# Altium PCB 超声波接近电路2-22PcbDoc.PcbDoc
Units mil, origin at the board's own origin, x right, y up, seen from the top; angles counter-clockwise.
Board outline 2495 x 1070 mil, 2 copper layers (Top Layer 1, Bottom Layer 1), stack 26.556 mil thick; 47 components, 104 nets, 229 pads, 81 vias.
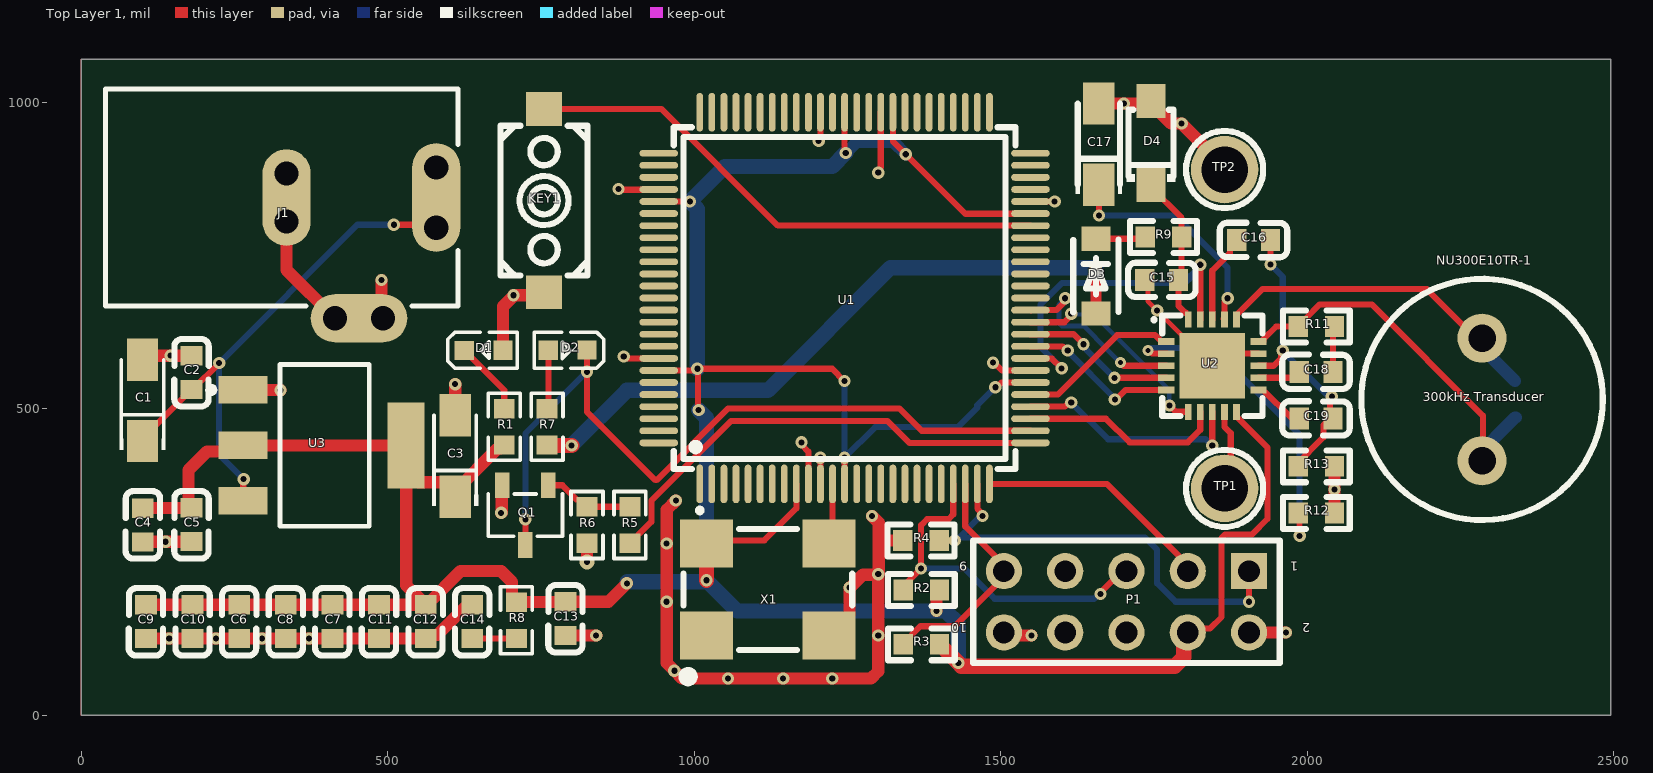
[diagram p0: Top Layer 1 view]
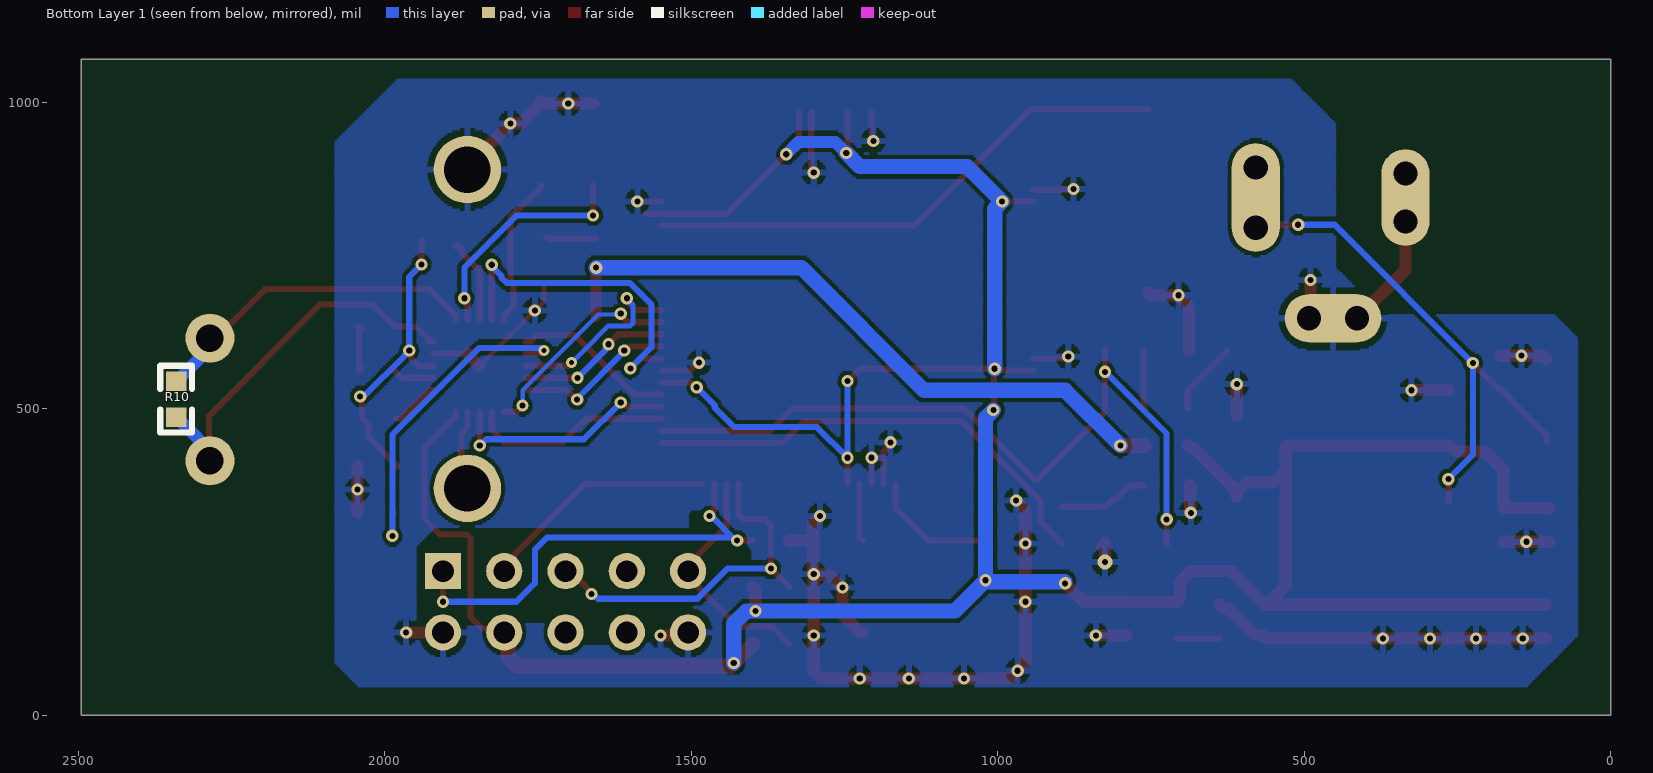
[diagram p1: Bottom Layer 1 view, seen from below]

## Layer stack, top to bottom
Top Solder: solder mask 0.4, Solder Resist, Dk 3.5
Top Layer 1: signal copper 1.378
Dielectric 4: prepreg 2.8, PP-006, Dk 4.1
Dielectric 2: prepreg 2.8, PP-006, Dk 4.1
Dielectric 1: dielectric 12.6, FR-4, Dk 4.8
Dielectric 3: prepreg 2.8, PP-006, Dk 4.1
Dielectric 5: prepreg 2.8, PP-006, Dk 4.1
Bottom Layer 1: signal copper 1.378
Bottom Solder: solder mask 0.4, Solder Resist, Dk 3.5

## Board outline
0,0 0,1070 2495,1070 2495,0

## Design rules (kind name [scope] priority, off if disabled: settings)
Clearance [All] p1: gap=6 ignorepadtopadclearanceinfootprint=FALSE except(0: Arc-Hole Track-Hole SMDPad-Hole THPad-Hole Via-Hole Fill-Hole Poly-Hole Region-Hole Text-Hole)
PolygonConnect [All] p1: connectstyle=Relief reliefconductorwidth=10 reliefentries=4 polygonreliefangle="90 Angle" airgapwidth=10
RoutingVias [All] p1: holewidth=28 width=50 viastyle="Through Hole" minholewidth=28 minwidth=50 maxholewidth=28 maxwidth=50
SolderMaskExpansion [All] p1: expansion=4 istentingtop=FALSE
Width PWR_Width [InNet('VCC3.3')] p1: maxlimit=20 minlimit=20 preferedwidth=20
Width GND_Width [InNet('GND')] p2: maxlimit=20 minlimit=20 preferedwidth=20
Width NORMAL [All] p3: maxlimit=10 minlimit=10 preferedwidth=10
30 further rules are at their usual default settings.

## Components (designator, comment, footprint, x,y, rotation, side; value= is the part's Value field where it differs from the comment)
"300kHz Transducer" "NU300E10TR-1" NU300E10TR-1 2285,415 r0 top
C1 "Cap Pol1" CAP-SMD_L3.2-W1.6-RD 100,457.22 r90 top value=100uF
C2 "Cap" C0603 180,531.32 r90 top value=0.1uF
C3 "Cap Pol1" CAP-SMD_L3.2-W1.6-RD 610,366.5 r90 top value=100uF
C4 "Cap" C0603 100.46,337.7 r270 top value=0.1uF
C5 "Cap" C0603 180,283.2 r90 top value=0.01uF
C6 "Cap" C0603 257.74,125 r90 top value=0.01uF
C7 "Cap" C0603 409.82,125 r90 top value=0.01uF
C8 "Cap" C0603 333.78,125 r90 top value=0.01uF
C9 "Cap" C0603 105.67,125 r90 top value=0.01uF
C10 "Cap" C0603 181.71,125 r90 top value=0.01uF
C11 "Cap" C0603 485.85,125 r90 top value=0.01uF
C12 "Cap" C0603 561.89,125 r90 top value=0.01uF
C13 "Cap" C0603 790,130 r90 top value=0.1uF
C14 "100nF" C0603 637.93,125 r90 top
C15 "100nF" C0603 1790,710 r180 top
C16 "3.3nF" C0603 1884.89,775 r0 top
C17 "2.2uF" CAP-SMD_L3.2-W1.6-RD 1660,875 r90 top
C18 "330pF" C0603 1986.91,559.95 r0 top
C19 "15nF" C0603 1986.91,483.95 r0 top
D1 "LED0" LED0603-RD_RED 585,480 r0 top
D2 "MHT192UGCT" LED0603-RD_GREEN 865,635.7 r180 top
D3 "1N4001W" SOD-123F_L2.8-W1.8-LS3.7-RD 1460,695 r270 top
D4 "SMF36A_C353286" SOD-123FL_L2.7-W1.8-LS3.8-RD -1945.81,6041.63 r90 top
J1 "PWR2.5" KLD-0202 39.72,844.37 r0 top
KEY1 "K2-3.6×6.1_SMD" KEY-SMD_2P-L6.2-W3.6-LS8.0 755,839.31 r270 top
P1 "Header 5X2" HDR2X5 1905,235 r180 top
Q1 "BC817-40,215" SOT-23-3_L2.9-W1.6-P1.90-LS2.8-BR 50723.47,-27657.24 r90 top
R1 "Res2" R0603 650,615 r270 top value=1K
R2 "Res2" R0603 1225.69,164 r0 top value=1K
R3 "Res2" R0603 1225.69,75.64 r0 top value=1K
R4 "Res2" R0603 1225,245 r0 top value=1K
R5 "470Ω" R0603 935,165.57 r90 top
R6 "20kΩ" R0603 865,165.57 r90 top
R7 "4.7kΩ" R0603 720,615 r270 top
R8 "1k" R0603 749.8,10.09 r90 top
R9 "10Ω" R0603 1620.69,740 r0 top
R10 "10kΩ" R0603 2300,370.69 r90 bottom
R11 "200Ω" R0603 2159.31,674.01 r180 top
R12 "0" R0603 1870,290 r0 top
R13 "0" R0603 1870,366 r0 top
TP1 "5009" TEST-TH_BD3.18-P1.93 1905,330 r0 top
TP2 "5009" TEST-TH_BD3.18-P1.93 1905,850 r0 top
U1 "EPM240T100C5N" TQFP-100_L14.0-W14.0-P0.50-LS16.0-BL 1360,620 r0 top
U2 "TUSS4470TRTJR" QFN-20_L4.0-W4.0-P0.50-TL-EP2.7 -46561.58,-47901.66 r0 top
U3 "REG1117-3" ZZ311 335,400 r270 top
X1 "24MHz" OSC-SMD_4P-L7.0-W5.0-BL_SIT1602 1060,-65 r0 top

## Footprints (in the part's own frame and the unit in brackets; to place one, negate y for a bottom-side part, rotate by r counter-clockwise, add the part's x,y. Pads: shape width x height; smd on the part's side, far side on the other; paste and mask are expansions set on the pad)
C0603 [mm]
  rect 0.8x0.9 smd: 1(0,0) 2(1.4,0)
  silkscreen extent -0.71,-0.71 2.09,0.72
CAP-SMD_L3.2-W1.6-RD [mil]
  rect 69.19x51.02 smd: 1(-10,0) 2(122.78,0)
  silkscreen extent -25,-37 122,37
HDR2X5 [mm] "Connector; Header; 5x2 Position"
  rect 1.5x1.5 hole 0.9: 1(0,0)
  round 1.5 hole 0.9: 2(0,2.54) 3(2.54,0) 4(2.54,2.54) 5(5.08,0) 6(5.08,2.54) 7(7.62,0) 8(7.62,2.54) 9(10.16,0) 10(10.16,2.54)
  silkscreen extent -1.27,-1.27 11.43,3.81
KEY-SMD_2P-L6.2-W3.6-LS8.0 [mm]
  rect 1.4x1.5 smd: 1(-3.8,0) 2(3.8,0)
  silkscreen extent -3.1,-1.8 3.1,1.8
KLD-0202 [mm] "DC Power Jack, 2.5mm, KLD Series, PCB Mount"
  oval 2x4.5 all layers, no hole: 1(13.7,0)
  round 1.5 hole 1: 1A(13.7,-1.25) 1B(13.7,1.25) 2A(7.5,-1) 2B(7.5,1) 3A(9.5,-5) 3B(11.5,-5)
  oval 2x4 all layers, no hole: 2(7.5,0)
  oval 4x2 all layers, no hole: 3(10.5,-5)
  silkscreen extent 0,-4.5 14.6,4.5
LED0603-RD_GREEN [mm]
  rect 0.8x0.8 smd: 1(1.016,1.016) 2(2.615,1.023)
  silkscreen extent 0.33,0.27 3.21,1.78
LED0603-RD_RED [mm]
  rect 0.8x0.8 smd: 1(1.016,2.921) 2(2.615,2.928)
  silkscreen extent 0.33,2.18 3.21,3.68
NU300E10TR-1 [mil]
  round 80 hole 45: 1(0,200) 2(0,0)
  silkscreen extent -197,-97 197,297
OSC-SMD_4P-L7.0-W5.0-BL_SIT1602 [mil]
  rect 86.61x78.74 smd: 1(-40,195) 2(160,195) 3(160,345) 4(-40,345)
  silkscreen extent -78,120 198,368
QFN-20_L4.0-W4.0-P0.50-TL-EP2.7 [mm]
  rect 0.665x0.28 smd: 1(1227.62,1232.18) 2(1227.62,1231.68) 3(1227.62,1231.18) 4(1227.62,1230.68) 5(1227.62,1230.18) 11(1231.435,1230.18) 12(1231.435,1230.68) 13(1231.435,1231.18) 14(1231.435,1231.68) 15(1231.435,1232.18)
  rect 0.28x0.665 smd: 6(1228.527,1229.273) 7(1229.027,1229.273) 8(1229.527,1229.273) 9(1230.027,1229.273) 10(1230.527,1229.273) 16(1230.527,1233.088) 17(1230.027,1233.088) 18(1229.527,1233.088) 19(1229.027,1233.088) 20(1228.527,1233.088)
  rect 2.7x2.7 smd: 21(1229.527,1231.18)
  silkscreen extent 1227.04,1229.1 1231.6,1233.26
R0603 [mil]
  rect 31.75x34.02 smd: 1(115,40) 2(174.31,40)
  silkscreen extent 90,14 199,66
SOD-123F_L2.8-W1.8-LS3.7-RD [mm]
  rect 1x1.2 smd: 1(-2.084,4.953) 2(1.016,4.953)
  silkscreen extent -2.05,4.02 0.96,5.9
SOD-123FL_L2.7-W1.8-LS3.8-RD [mm]
  rect 1.4x1.2 smd: 1(-131.486,-93.747) 2(-128.017,-93.747)
  silkscreen extent -131.36,-94.75 -128.38,-92.74
SOT-23-3_L2.9-W1.6-P1.90-LS2.8-BR [mm]
  rect 1.07x0.6 smd: 1(712.019,1269.025) 2(712.019,1270.925) 3(709.549,1269.975)
  silkscreen extent 709.91,1268.44 711.66,1271.51
TEST-TH_BD3.18-P1.93 [mm]
  round 2.8 hole 1.93: 1(-1.016,1.016)
  silkscreen extent -2.62,-0.58 0.58,2.61
TQFP-100_L14.0-W14.0-P0.50-LS16.0-BL [mm]
  oval 0.28x1.6 smd: 1(-8.915,-6.166) 2(-8.415,-6.166) 3(-7.915,-6.166) 4(-7.415,-6.166) 5(-6.915,-6.166) 6(-6.415,-6.166) 7(-5.915,-6.166) 8(-5.415,-6.166) 9(-4.915,-6.166) 10(-4.415,-6.166) 11(-3.915,-6.166) 12(-3.415,-6.166) 13(-2.915,-6.166) 14(-2.415,-6.166) 15(-1.915,-6.166) 16(-1.415,-6.166) 17(-0.915,-6.166) 18(-0.415,-6.166) 19(0.085,-6.166) 20(0.585,-6.166) 21(1.085,-6.166) 22(1.585,-6.166) 23(2.085,-6.166) 24(2.585,-6.166) 25(3.085,-6.166) 51(3.085,9.234) 52(2.585,9.234) 53(2.085,9.234) 54(1.585,9.234) 55(1.085,9.234) 56(0.585,9.234) 57(0.085,9.234) 58(-0.415,9.234) 59(-0.915,9.234) 60(-1.415,9.234) 61(-1.915,9.234) 62(-2.415,9.234) 63(-2.915,9.234) 64(-3.415,9.234) 65(-3.915,9.234) 66(-4.415,9.234) 67(-4.915,9.234) 68(-5.415,9.234) 69(-5.915,9.234) 70(-6.415,9.234) 71(-6.915,9.234) 72(-7.415,9.234) 73(-7.915,9.234) 74(-8.415,9.234) 75(-8.915,9.234)
  oval 1.6x0.28 smd: 26(4.785,-4.466) 27(4.785,-3.966) 28(4.785,-3.466) 29(4.785,-2.966) 30(4.785,-2.466) 31(4.785,-1.966) 32(4.785,-1.466) 33(4.785,-0.966) 34(4.785,-0.466) 35(4.785,0.034) 36(4.785,0.534) 37(4.785,1.034) 38(4.785,1.534) 39(4.785,2.034) 40(4.785,2.534) 41(4.785,3.034) 42(4.785,3.534) 43(4.785,4.034) 44(4.785,4.534) 45(4.785,5.034) 46(4.785,5.534) 47(4.785,6.034) 48(4.785,6.534) 49(4.785,7.034) 50(4.785,7.534) 76(-10.615,7.534) 77(-10.615,7.034) 78(-10.615,6.534) 79(-10.615,6.034) 80(-10.615,5.534) 81(-10.615,5.034) 82(-10.615,4.534) 83(-10.615,4.034) 84(-10.615,3.534) 85(-10.615,3.034) 86(-10.615,2.534) 87(-10.615,2.034) 88(-10.615,1.534) 89(-10.615,1.034) 90(-10.615,0.534) 91(-10.615,0.034) 92(-10.615,-0.466) 93(-10.615,-0.966) 94(-10.615,-1.466) 95(-10.615,-1.966) 96(-10.615,-2.466) 97(-10.615,-2.966) 98(-10.615,-3.466) 99(-10.615,-3.966) 100(-10.615,-4.466)
  silkscreen extent -9.99,-7.37 4.16,8.61
ZZ311 [mil]
  rect 45x80 smd: 1(-130.55,-70.74) 2(-40,-70.74) 3(50.55,-70.74)
  rect 140x60 smd: 4(-40,195)
  silkscreen extent -172,-128 92,135

## Part data
C1 C3: "Polarized Capacitor (Radial)", LatestRevisionDate=17-Jul-2002, LatestRevisionNote="Re-released for DXP Platform.", PackageReference=RB7.6-15, Published=8-Jun-2000, Publisher="Altium Limited"
C2 C4 C5 C6 C7 C8 C9 C10 C11 C12 C13: "Capacitor", LatestRevisionDate=17-Jul-2002, LatestRevisionNote="Re-released for DXP Platform.", PackageReference=RAD-0.3, Published=8-Jun-2000, Publisher="Altium Limited"
C15: BOM_JLCPCB Part Class="Basic Part", BOM_Manufacturer=YAGEO, BOM_Manufacturer Part=CC0603KRX7R9BB104, BOM_Supplier=LCSC, BOM_Supplier Part=C14663, nameAlias=Capacitance, spicePre=C, spiceSymbolName=CC0603KRX7R9BB104
C16: BOM_JLCPCB Part Class="Extended Part", BOM_Manufacturer=MuRata, BOM_Manufacturer Part=GRM1885C1H332JA01D, BOM_Supplier=LCSC, BOM_Supplier Part=C77036, nameAlias=Capacitance, spicePre=C, spiceSymbolName=GRM1885C1H332JA01D
C17: library part 2.2uF_1, BOM_JLCPCB Part Class="Extended Part", BOM_Manufacturer=KEMET, BOM_Manufacturer Part=T491A225K035AT, BOM_Supplier=LCSC, BOM_Supplier Part=C122264, Contributor=LCSC, nameAlias=Capacitance, spicePre=C, spiceSymbolName=T491A225K035AT
C18: BOM_JLCPCB Part Class="Basic Part", BOM_Manufacturer=SAMSUNG, BOM_Manufacturer Part=CL10C331JB8NNNC, BOM_Supplier=LCSC, BOM_Supplier Part=C1664, nameAlias=Capacitance, spicePre=C, spiceSymbolName=CL10C331JB8NNNC
C19: BOM_JLCPCB Part Class="Extended Part", BOM_Manufacturer=YAGEO, BOM_Manufacturer Part=CC0603JRX7R9BB153, BOM_Supplier=LCSC, BOM_Supplier Part=C519550, Contributor=LCSC, nameAlias=Capacitance, spicePre=C, spiceSymbolName=CC0603JRX7R9BB153
D1: "Typical INFRARED GaAs LED", LatestRevisionDate=08-Jul-2005, LatestRevisionNote="Mech Layer 1 removed.", PackageReference=LED-0, Published=8-Jun-2000, Publisher="Altium Limited"
D2: BOM_JLCPCB Part Class="Extended Part", BOM_Manufacturer=MEIHUA, BOM_Manufacturer Part=MHT192UGCT, BOM_Supplier=LCSC, BOM_Supplier Part=C389519, Contributor=LCSC, spicePre=L, spiceSymbolName=MHT192UGCT
D3: BOM_JLCPCB Part Class="Extended Part", BOM_Manufacturer=Jingdao, BOM_Manufacturer Part=1N4001W, BOM_Supplier=LCSC, BOM_Supplier Part=C162732, Contributor=LCSC, spicePre=D, spiceSymbolName=1N4001W
D4: BOM_JLCPCB Part Class="Extended Part", BOM_Manufacturer="Shandong Jingdao Microelectronics", BOM_Manufacturer Part=SMF36A, BOM_Supplier=LCSC, BOM_Supplier Part=C353286, Contributor=LCSC, spicePre=D, spiceSymbolName=SMF36A_C353286
J1: "Low Voltage Power Supply Connector", ComponentLink1Description="Manufacturer Link", ComponentLink1URL=http://domino.kycon.com/internet/Products.html, DatasheetDocument=09-May-2002, Published=17-Dec-2003, Publisher="Altium Limited"
KEY1: BOM_Manufacturer Part=K2-1107ST-A4SW-06, BOM_Supplier=LCSC, BOM_Supplier Part=C118141, Contributor=LCEDA_Lib, spicePre=K, spiceSymbolName=K2-3.6×6.1_SMD, 制造商=韩国韩荣
P1: "Header, 5-Pin, Dual row", LatestRevisionDate=17-Jul-2002, LatestRevisionNote="Re-released for DXP Platform.", Publisher="Altium Limited"
Q1: BOM_JLCPCB Part Class="Extended Part", BOM_Manufacturer=Nexperia, BOM_Manufacturer Part=BC817-40,215, BOM_Supplier=LCSC, BOM_Supplier Part=C52801, spicePre=Q, spiceSymbolName=BC817-40,215
R1 R2 R3 R4: "Resistor", LatestRevisionDate=17-Jul-2002, LatestRevisionNote="Re-released for DXP Platform.", PackageReference=AXIAL-0.4, Published=8-Jun-2000, Publisher="Altium Limited"
R5: BOM_JLCPCB Part Class="Extended Part", BOM_Manufacturer=UniOhm, BOM_Manufacturer Part=0603WAJ0471T5E, Resistance (Ohms)=470, BOM_Supplier=LCSC, BOM_Supplier Part=C25241, nameAlias=Resistance, spicePre=R, spiceSymbolName=0603WAJ0471T5E
R6: BOM_JLCPCB Part Class="Basic Part", BOM_Manufacturer=UniOhm, BOM_Manufacturer Part=0603WAF2002T5E, Resistance (Ohms)=20K, BOM_Supplier=LCSC, BOM_Supplier Part=C4184, nameAlias=Resistance, spicePre=R, spiceSymbolName=0603WAF2002T5E
R7: BOM_JLCPCB Part Class="Basic Part", BOM_Manufacturer=UniOhm, BOM_Manufacturer Part=0603WAF4701T5E, Resistance (Ohms)=4.7K, BOM_Supplier=LCSC, BOM_Supplier Part=C23162, nameAlias=Resistance, spicePre=R, spiceSymbolName=0603WAF4701T5E
R9: BOM_JLCPCB Part Class="Extended Part", BOM_Manufacturer=PANASONIC, BOM_Manufacturer Part=ERJPA3J100V, Resistance (Ohms)=10, BOM_Supplier=LCSC, BOM_Supplier Part=C441879, Contributor=LCSC, nameAlias=Resistance, spicePre=R, spiceSymbolName=ERJPA3J100V
R10: BOM_JLCPCB Part Class="Basic Part", BOM_Manufacturer=UniOhm, BOM_Manufacturer Part=0603WAF1002T5E, Resistance (Ohms)=10K, BOM_Supplier=LCSC, BOM_Supplier Part=C25804, nameAlias=Resistance, spicePre=R, spiceSymbolName=0603WAF1002T5E
R11: BOM_JLCPCB Part Class="Extended Part", BOM_Manufacturer=PANASONIC, BOM_Manufacturer Part=ERJ-PA3F2000V, Resistance (Ohms)=200, BOM_Supplier=LCSC, BOM_Supplier Part=C254528, Contributor=LCSC, nameAlias=Resistance, spicePre=R, spiceSymbolName=ERJ-PA3F2000V
R12 R13: library part 0_1, BOM_JLCPCB Part Class="Extended Part", BOM_Manufacturer=YAGEO, BOM_Manufacturer Part=RC0603JR-070RL, Resistance=0Ω, BOM_Supplier=LCSC, BOM_Supplier Part=C95177, nameAlias="Resistance (Ohms)", spicePre=R, spiceSymbolName=RC0603JR-070RL
TP1 TP2: BOM_JLCPCB Part Class="Extended Part", BOM_Manufacturer=Keystone, BOM_Manufacturer Part=5009, BOM_Supplier=LCSC, BOM_Supplier Part=C238126, Contributor=LCSC, spicePre=U, spiceSymbolName=5009
U1: "MAX II 3.3/2.5V CPLD, 80 IOs, 240 Logic Elements, 100-Pin Plastic TQFP, Commercial Temperature, Speed Grade 5, Pb-Free", Supplier Part Number 1=544-1964-ND, Code_JEDEC=MS-026-AED, ComponentLink1Description="Manufacturer Link", ComponentLink1URL=http://www.altera.com/products/devices/cpld/max2/mx2-index.jsp, ComponentLink2Description=Handbook, ComponentLink2URL=http://www.altera.com/literature/hb/max2/max2_mii5v1.pdf, ComponentLink3Description="Packaging Specification", ComponentLink3URL=http://www.altera.com/literature/ds/dspkg.pdf, DatasheetVersion="ver1.8, Jul-2006", LatestRevisionDate=13-Apr-2006, LatestRevisionNote="IPC-7351 Footprint Added.", Note="Each set of VCCIO pins can be connected to 3.3V, 2.5V, 1.8V, or 1.5V.", PackageDescription="100-Pin Plastic Thin Quad Flat Pack (TQFP100) - Wire Bond", PackageReference=TQFP100, PackageVersion="ver15.1, May-2008", Published=4-Mar-2005, Publisher="Altium Limited", Supplier 1=Digi-Key, Supplier 2=Farnell, Supplier 3=Farnell, Supplier Part Number 2=1662268, Supplier Part Number 3=1453503
U2: library part CMP-0081414-4, "Ultrasonic Sensor Signal Conditioner IC for Directly", Alternate Manufacturer="Texas Instruments", Alternate PartNumber=PGA44801RTJT, AEC Category=Q200, AEC Qualified=N, ComponentLink1Description="Datasheet Link", ComponentLink1URL=http://www.ti.com/lit/ds/symlink/pga448.pdf, ComponentLink2Description="Product Folder", ComponentLink2URL=http://www.ti.com/product/pga448, ComponentLink3Description="Online Datasheet", ComponentLink3URL=http://www.ti.com/product/pga448/datasheet, CompType=IC, Manufacturer="Texas Instruments", MountType=SMT, PackageDescription=WQFN-20, PackageReference=RTJ0020J, PartNumber=TUSS4470TRTJR, SizeArea_mm2=16, SizeAreaWB_mm2=25, SizeX_mm=4, SizeY_mm=4, SizeZ_mm=0.8
U3: "800mA Low Dropout Positive Regulator Fixed 2.85V,3V,3.3V and 5V", ComponentLink1Description="Manufacturer Link", ComponentLink1URL=http://www.ti.com/, ComponentLink2Description=Datasheet, ComponentLink2URL=http://www-s.ti.com/sc/ds/reg1117.pdf, DatasheetVersion=1994, LatestRevisionDate=17-Jul-2002, LatestRevisionNote="Re-released for DXP Platform.", PackageDescription="SOT-223/SC-73; 4 Leads; Body 6.7 x 7.3 mm, inc. leads (LxW max)", PackageReference=ZZ311, PackageVersion=revC, Published=8-Jun-2000, Publisher="Altium Limited"
X1: library part oscillator
C14: Contributor=LCEDA_Lib, nameAlias=Value(F), spicePre=C, spiceSymbolName=C_0603_US
R8: Contributor=LCEDA_Lib, nameAlias=Value(Ω), spicePre=R, spiceSymbolName=R_0603_EU

## Via types
v1: diameter 20, hole 10, Top Layer 1 to Bottom Layer 1, tented both sides, 78 vias
v2: diameter 18, hole 8, Top Layer 1 to Bottom Layer 1, tented both sides, 2 vias
v3: diameter 24, hole 10, Top Layer 1 to Bottom Layer 1, 1 vias

## Nets (pads, with @x,y where several pads share a name; then routed paths per layer and width w, separated by ;. In a path a pad name is that pad's centre, name@x,y a point inside that pad or via, vN(x,y) a via of type N, cw(c..) or ccw(c..) an arc to the next point about the centre after c; other vN are vias at no path point)
DGND: R12.1 U2.2 | length 535.6
  Top Layer 1 w10: v2(1740,595) 1742.16,595 1746.97,590.2 1769.39,590.2 U2.2 ; R12.1 1987.5,327.5 v1(1987.5,292.5)
  Bottom Layer 1 w10: v2@1746.21,599.04 1845.96,599.04 1987.5,457.5 v1(1987.5,292.5)
GND: C1.2 C2.2 C3.2 C4.2 C5.1 C6.1 C7.1 C8.1 C9.1 C10.1 C11.1 C12.1 C13.1 C14.2 C15.2 C17.2 D1.2 D4.2 J1.2 J1.2A J1.2B J1.3 J1.3A J1.3B KEY1.2 P1.2 P1.10 Q1.2 R4.1 R6.1 R12.2 R13.2 TP2.1 U1.10 U1.11 U1.32 U1.46 U1.60 U1.65 U1.79 U1.93 U2.14 U2.21 U3.1 X1.2 | length 3642.4
  Top Layer 1 w8: C15.2@1739.89,705 1739.89,675.11 v1(1755,660) 1796.85,618.15 U2.21
  Top Layer 1 w10: v1@876.48,856.97 U1.79@942.08,856.97 ; v1@885,581.97 U1.93 ; v1(1175,445) 1175,441.21 1186.17,430.04 U1.10 ; v1(1202.93,936.72) 1202.93,940.5 1205.66,943.24 1205.66,983.35 U1.65 ; U1.11@1205.63,377.48 v1(1205.63,420) ; v1(1300,885) 1300,888.79 1304.28,893.07 U1.60 ; R4.1@1338.87,285 R4.1@1340,283.87 ; v1(1487.16,575) 1489.33,575 1501.88,562.45 1547.35,562.45 U1.32@1547.38,562.49 ; U1.46 v1(1587.88,837.88) ; U2.21@1864.69,589.68 U2.14
  Top Layer 1 w20: C4.2 100.76,282.9 v1(137.73,282.9) 174.7,282.9 C5.1@175,283.2 ; C1.2@105,580 111.43,586.43 v1(145.71,586.43) C2.2 ; C9.1 v1(143.69,125) C10.1 v1(219.73,125) C6.1 v1(371.8,125) C11.1 C12.1 567.64,130.75 580.75,130.75 624.36,174.36 632.18,174.36 C14.2 ; U3.1 324.45,530.55 v1(325,530) ; J1.2A 335,726.26 J1.3A ; J1.3 462.87,647.52 490,674.65 v1(490,710) ; C3.2 v1(610,540) ; v1(685,330) 685.77,330.77 685.77,373.7 Q1.2 ; D1.2 687.95,666.87 705,683.92 v1(705,685) 750.3,685 KEY1.2 ; C13.1 v1(840,130) ; v3(825,250) R6.1 R6.1@830,275.57 ; v1(970,350) 955,335 v1(955,280) v1(955,185) 955,85 v1(967.5,72.5) 980,60 v1(1055,60) v1(1145,60) v1(1225,60) 1288.28,60 1300,71.72 v1(1300,130) v1(1300,230) ; X1.2@1220,135 1223.94,135 1253.31,164.37 v1(1253.31,208.31) 1254.39,208.31 1275.32,229.23 1299.23,229.23 v1(1300,230) ; v1(1290,325) 1300.77,314.23 1300.77,285 ; R4.1@1338.87,285 1300.77,285 ; R4.1@1340,283.87 R4.1 ; P1.10 1510,130 v1(1550,130) ; P1.10@1505,145 P1.10@1507.53,142.47 ; C17.2 v1(1700.58,997.78) D4.2@1741.17,997.78 ; D4.2 1745,997.67 1777.67,965 v1(1795,965) 1865,895 TP2.1 ; U2.21 U2.21@1864.69,589.68 ; P1.2 v1(1965,135) ; R12.2 v1(2044.31,368) R13.2 ; v1(1300,230) 1300.77,230.77 1300.77,285
  other v1: 295,125 885,585 876.48,858.21
NetC1_1: C1.1 C2.1 J1.1 J1.1A J1.1B U3.3 | length 894.9
  Top Layer 1 w10: C1.1@105,447.22 105,456.31 167.28,518.59 167.28,520.57 178.03,531.32 C2.1 181.97,531.32 v1(225,574.35) v1@225,575 ; U3.3 264.26,384.26 v1(265,385) ; v1(510,800) 547.34,800 579.09,831.75 J1.1
  Bottom Layer 1 w10: v1(265,385) 225,425 v1(225,574.35) 450.65,800 v1(510,800)
NetC14_1: C14.1 R8.1 | length 71.9
  Top Layer 1 w10: C14.1 638.02,125.09 R8.1
NetC15_1: C15.1 D4.1 R9.2 U2.20 | length 249.8
  Top Layer 1 w10: D4.1 1745,861.06 1795,811.06 R9.2 1795,710 1790,705 1790,667.28 1800.86,656.43 1801.88,656.43 1805.63,652.68 U2.20
NetC16_1: C16.1 U2.18 | length 141.1
  Top Layer 1 w10: U2.18 1845,725.11 1874.14,754.25 1874.14,762.28 1876.86,765 C16.1@1884.89,765
NetC17_1: C17.1 U2.17 | length 384.4
  Top Layer 1 w10: v1(1660,815) C17.1 ; U2.17@1863.18,646.61 U2.17 1864.69,674.68 v1(1870,680)
  Bottom Layer 1 w10: v1(1660,815) 1785,815 1870,730 v1(1870,680)
NetC18_1: C18.1 U2.12 | length 66.5
  Top Layer 1 w10: U2.12@1920.61,549.8 U2.12 1972.27,550.32 C18.1@1981.91,559.95
NetC18_2: C18.2 R11.1 | length 85.3
  Top Layer 1 w10: C18.2@2037.02,564.95 C18.2 2042.02,631.71 R11.1 ; R11.1@2037.02,631.71 R11.1@2039.31,634.01
NetC19_1: C19.1 U2.11 | length 81.1
  Top Layer 1 w10: U2.11 1927.68,530.63 1974.36,483.95 C19.1@1981.91,483.95
NetD1_1: D1.1 R1.1 | length 121.9
  Top Layer 1 w10: D1.1 690,530 R1.1
NetD2_2: D2.2 R7.1 | length 96.3
  Top Layer 1 w10: R7.1 762.05,502.05 D2.2
NetD3_1: D3.1 R9.1 | length 81.9
  Top Layer 1 w10: D3.1 1732.74,777.05 R9.1
NetQ1_1: Q1.1 R5.2 R6.2 | length 142.7
  Top Layer 1 w10: Q1.1 785,375 809.25,350.75 814.12,350.75 R6.2 ; R6.2@830,339.88 R5.2
P1: U1.1
P2: U1.2
P3: U1.3
P4: U1.4
P5: U1.5
P6: U1.6
P7: U1.7
P8: U1.8
P12: U1.12 X1.3 | length 94.5
  Top Layer 1 w10: X1.3@1220,285 1225.54,290.54 U1.12
P14: U1.14
P15: U1.15
P16: U1.16
P17: U1.17
P18: U1.18
P19: U1.19
P20: U1.20
P21: U1.21
P26: R5.1 U1.26 | length 771.7
  Top Layer 1 w10: R5.1 896.13,280.57 907.01,291.44 907.01,292.58 930,315.57 930,350 1060,480 1315,480 1350.82,444.18 U1.26
P27: D2.1 Q1.3 U1.27 | length 1258.1
  Top Layer 1 w10: Q1.3 v1(724.47,319.47) v1@725,320 ; D2.1 v1(825,560) 825,495 936.53,383.47 938.47,383.47 1055,500 1335,500 1371.14,463.87 U1.27
  Bottom Layer 1 w10: v1(724.47,319.47) 724.47,459.47 v1(825,560)
P28: U1.28 U2.7 | length 330.9
  Top Layer 1 w10: U1.28 1671.57,483.55 1710.12,445 1805,445 1825.31,465.32 U2.7
P29: U1.29 U2.8 | length 383.3
  Top Layer 1 w10: U1.29 1604.45,503.23 1611.21,510 v1(1615,510) ; v1(1845,440) U2.8
  Bottom Layer 1 w10: v1(1615,510) 1675,450 1834.14,450 1844.14,440 v1(1845,440)
P30: U1.30 U2.1 | length 266.1
  Top Layer 1 w10: U1.30 1592.92,522.92 1690,620 1751.69,620 1761.81,609.88 1769.39,609.88 U2.1
P33: U1.33 U2.19 | length 556
  Top Layer 1 w10: U1.33@1548.33,581.78 1583.22,581.78 v1(1599.23,565.77) ; U2.19 v1(1825.26,734.74)
  Bottom Layer 1 w10: v1(1599.23,565.77) 1565,600 1565,670 1600,705 1801.08,705 1809.58,713.5 1809.58,716.91 1825.26,732.58 v1(1825.26,734.74)
P34: U1.34 U2.5 | length 265.7
  Top Layer 1 w10: U1.34 1600.9,601.66 1607.56,595 v1(1609.19,595) ; v1(1686.08,515) 1688.25,515 1703.88,530.63 U2.5
  Bottom Layer 1 w10: v1(1609.19,595) 1609.19,593.45 1686.08,516.55 v1(1686.08,515)
P35: U1.35 U2.4 | length 254.5
  Top Layer 1 w10: U1.35@1547.66,621.82 1548.13,621.34 U1.35 1618.66,621.34 v1(1635,605) ; v1(1685.29,550.29) U2.4
  Bottom Layer 1 w10: v1(1635,605) 1635,602.29 1640,597.29 1640,595.57 v1(1685.29,550.29)
P36: U1.36 U2.6 | length 339.1
  Top Layer 1 w10: U1.36 1603.87,641.03 1612.84,650 v1@1615,650 ; v1(1775,505) 1785.12,494.9 U2.6
  Bottom Layer 1 w7: v1@1617.16,653.47 1651.53,653.47 1775,530 v1(1775,505)
  other v1: 1615,655
P37: U1.37 U2.3 | length 316.8
  Top Layer 1 w10: U1.37@1549.09,660 U1.37 1590.71,660.71 1603.47,673.47 1603.47,678.47 v1(1605,680) ; v2(1695,575) 1700,570 U2.3
  Bottom Layer 1 w8: v1@1605,679.14 1595,669.14 1595,639.69 1599.69,635 1635,635 1674.45,595.55 v2(1695,575)
  Bottom Layer 1 w10: v1@1605,679.14 v1(1605,680)
P38: U1.38
P39: U1.39
P40: U1.40
P41: U1.41
P42: U1.42
P43: U1.43
P44: KEY1.1 U1.44 | length 872.2
  Top Layer 1 w10: KEY1.1 946.09,988.91 1136.49,798.51 U1.44
P47: U1.47
P48: U1.48
P49: U1.49
P50: U1.50
P51: U1.51
P52: U1.52
P53: U1.53
P54: U1.54
P55: U1.55
P56: U1.56
P57: U1.57
P58: U1.58
P61: U1.61
P62: U1.62
P64: U1.64
P66: U1.66
P67: U1.67
P68: U1.68
P69: U1.69
P70: U1.70
P71: U1.71
P72: U1.72
P73: U1.73
P74: U1.74
P75: U1.75
P76: U1.76
P77: U1.77
P78: U1.78
P81: U1.81
P82: U1.82
P83: U1.83
P84: U1.84
P85: U1.85
P86: U1.86
P87: U1.87
P88: U1.88
P89: U1.89
P90: U1.90
P91: U1.91
P92: U1.92
P95: U1.95
P96: U1.96
P97: U1.97
P98: U1.98
P99: U1.99
P100: U1.100
SGND: C16.2 C19.2 R13.1 U2.13 | length 494.9
  Top Layer 1 w10: U2.13 1945,570 1957.32,582.32 1957.32,592.32 v1(1960,595) ; v1(1940,735) C16.2 ; R13.1@1980,406 1980,407.13 2026.27,453.4 2026.27,473.2 2037.02,483.95 2037.02,517.02 v1(2040,520)
  Bottom Layer 1 w10: v1(1940,735) 1960,715 v1(1960,595) 1965.6,589.4 1965.6,588.33 1967.59,586.33 ; 1967.61,586.31 2033.93,520 v1(2040,520)
TCK: P1.1 R4.2 U1.24 | length 758.5
  Top Layer 1 w10: R4.2 v1(1425,285) ; U1.24 1461.96,377.05 1461.96,336.83 1470,328.79 v1(1470,325) ; v1(1905,185) P1.1@1905,245
  Bottom Layer 1 w10: v1(1425,285) v1@1426.53,286.53 ; v1(1470,325) 1467.5,325 1429.03,286.53 v1@1426.53,286.53 ; v1(1905,185) 1785,185 1755,215 1755,270 1735,290 1432.16,290 1428.7,286.53 v1@1426.53,286.53
TDI: P1.9 R3.1 U1.23 | length 388.6
  Top Layer 1 w10: R3.1 1340.69,116.77 1368.92,145 1425,145 1505,225 1505,245 1442.08,307.92 U1.23
TDO: P1.3 U1.25 | length 378.3
  Top Layer 1 w10: U1.25 1672.75,377.25 P1.3@1805,245
TMS: P1.5 R2.1 U1.22 | length 603.8
  Top Layer 1 w10: R2.1@1340.69,209 1340.69,210.13 v1(1370,239.44) 1370,310 1380,320 1415,320 1422.39,327.39 U1.22 ; v1(1662.5,197.5) 1662.5,200 1700,237.5 1700,240 P1.5@1705,245
  Bottom Layer 1 w10: v1(1370,239.44) 1440.56,239.44 1490,190 1652.29,190 1659.79,197.5 v1(1662.5,197.5)
VCC: D3.2 R7.2 | length 1095.4
  Top Layer 1 w10: R7.2 R7.2@760.69,440
  Top Layer 1 w18: D3.2@1655,650 v1(1655,730)
  Top Layer 1 w25: R7.2@760.69,440 v1(800,440)
  Bottom Layer 1 w25: v1(800,440) 890,530 1120,530 1320,730 v1(1655,730)
VCC3.3: C3.1 C4.1 C5.2 C6.2 C7.2 C8.2 C9.2 C10.2 C11.2 C12.2 C13.2 P1.4 R1.2 R2.2 R3.2 R8.2 U1.9 U1.13 U1.31 U1.45 U1.59 U1.63 U1.80 U1.94 U2.10 U3.2 U3.4 X1.4 | length 6071.5
  Top Layer 1 w10: U1.94 942.27,562.49 1002.49,562.49 v1(1005,565) 1225,565 v1(1245,545) ; U1.80 v1(992.84,837.88) ; v1@1005.2,564.8 1006.05,563.95 1006.05,498.95 v1(1007.11,497.89) ; X1.4@1020,285 1114.24,285 1166.49,337.24 U1.9 ; U1.13@1245,377.48 v1(1245,420) ; v1@1245.23,916.93 U1.63 ; U1.59 1323.97,936.03 v1(1345,915) 1442.14,817.86 U1.45@1548.71,817.86 ; v1(1491.08,535) 1493.25,535 1500.85,542.6 U1.31 U1.31@1548.62,542.6 ; U1.45 U1.45@1548.71,817.86 ; U1.45@1574.69,817.86 U1.45@1548.71,817.86 ; P1.4 1811.49,141.49 1841.49,141.49 1860,160 1860,289.14 1865.86,295 1910,295 1935,320 1935,436.69 1884.37,487.32 U2.10
  Top Layer 1 w20: C4.1 100.76,338.01 174.7,338.01 175,338.31 175,400 205,430 254.26,430 U3.2 U3.4 U3.4@530,400 ; C9.2 C8.2 C12.2@559.92,180.11 ; C3.1 C3.1@610,364.49 ; R1.2 684.12,434.81 679.23,434.81 610,365.59 C3.1@610,364.49 ; v1(890,215) 860.11,185.11 C13.2 789.65,184.76 710.16,184.76 R8.2 708.67,184.4 702.8,190.28 702.8,217.2 685,235 618.75,235 563.86,180.11 C12.2 C12.2@559.92,180.11 ; v1(1395,170) 1395,204 R2.2@1400,209 ; U3.4@530,400 530,212 554.17,187.83 554.17,185.86 C12.2@559.92,180.11 ; U3.4@530,400 550,380 594.49,380 C3.1@610,364.49
  Top Layer 1 w25: v1(1020,220) X1.4@1020,285 ; R3.2 1400,114.51 1403.38,111.13 1404.51,111.13 v1(1430.64,85) 1435.64,80 1783.84,80 1798.48,94.64 1798.48,128.48 P1.4
  Bottom Layer 1 w10: v1(1245,420) 1295,470 1429.86,470 1461.67,501.8 1461.67,505.58 v1(1491.08,535) ; v1(1245,545) 1245,422.8 v1@1246.21,421.59
  Bottom Layer 1 w20: v1(1247.03,916.93) 1265.11,935 1325,935 v1(1345,915)
  Bottom Layer 1 w25: v1@890.71,217.91 1017.91,217.91 v1(1020,220) ; v1(1005,565) 1005,825.72 v1(992.84,837.88) 1049.96,895 1225.11,895 v1(1247.03,916.93) ; v1(1007.11,497.89) 1020,485 v1(1020,220) ; v1(1430.64,85) 1430.64,149.36 1410,170 1070,170 v1(1020,220)
VOUT: TP1.1 U2.9 | length 123.8
  Top Layer 1 w10: U2.9@1864.84,494.74 U2.9 1864.69,470.32 1875,460 1875,390 TP1.1@1865,380 ; TP1.1@1884.84,380.16 TP1.1@1885,380
X+: "300kHz Transducer.2" R10.1 R11.2 U2.15 | length 634.5
  Top Layer 1 w10: U2.15 1927.68,609.37 1928.19,609.88 1928.19,613.07 1949.12,634.01 R11.2 ; R11.2@1986.13,636.27 1995.88,646.01 1996.2,646.01 2020.19,670 2105,670 2286.25,488.75 2286.25,416.25 2285,415
  Bottom Layer 1 w20: 2285,415 2285,431.24 2306.09,452.32 2306.09,452.91 2338.87,485.69 R10.1
X-: "300kHz Transducer.1" R10.2 U2.16 | length 550.5
  Top Layer 1 w10: U2.16 1884.37,652.68 1926.69,695 2195,695 2280,610
  Bottom Layer 1 w10: 2285,598.87 2285,615 ; 2303.87,624.31 2305,624.31 ; R10.2@2338.87,545 R10.2
  Bottom Layer 1 w20: 2285,598.87 R10.2@2338.87,545
pads on no net: P1.6 P1.7 P1.8 X1.1
copper on no net: | length 7130
  Top Layer 1 w1: 0,0 2495,0 2495,1070 0,1070 0,0

## Polygon pours and split planes (outlines as drawn)
GND on Bottom Layer 1 "NONET_L-01_P-001" (hatched Horizontal grid 4 track 5, remove dead copper, pour order 0): 525,1040 1975,1040 2080,935 2080,85 2040,45 140,45 55,130 55,615 95,655 375,655 450,730 450,965

## Other copper
Bottom Layer 1:
  pour cut-out: 1490,280 1930,280 1945,265 1940,260 1940,200 1770,200 1735,165 1735,115 1580,115 1575,120 1582.5,127.5 1582.5,190 1475,190 1470,195 1470,265 1487.5,282.5
  pour cut-out: 1920,305 1950,275 1950,140 1570,160 1470,195 1465,275 1495,305
  pour cut-out: 1662.5,197.5 1692.5,197.5 1725,200 1725,170 1682.5,162.5 1657.5,187.5 1657.5,192.5
  pour cut-out: 1527.5,182.5 1557.5,182.5 1590,185 1590,155 1547.5,147.5 1522.5,172.5 1522.5,177.5
  pour cut-out: 1415,285 1400,270 1400,245 1430,245 1450,225 1485,225 1490,230 1490,280 1485,285
  pour cut-out: 1470,315 1460,305 1455,305 1465,295 1505,295 1505,330 1500,335 1470,335
  pour cut-out: 1645,615 1665,615 1705,575 1705,555 1700,550 1665,550 1645,570

## Silkscreen, mask and mechanical layers (free items; w line width, h text height)
Drill Drawing:
  text ".legend" at 2810,594.99 h60

## Text inside footprints (layer, text, board x,y; h text height)
P1: Top Overlay "10" at 1445,155 h25 r180; Top Overlay "9" at 1445,255 h25 r180; Top Overlay "1" at 1985,255 h25 r180; Top Overlay "2" at 2005,155 h25 r180